# Altium PCB PCB_Keypad_Rev2_2025-01-16.pcbdoc
Units mil, origin at the board's own origin, x right, y up, seen from the top; angles counter-clockwise.
Board outline 5776.66 x 5327.31 mil, 2 copper layers (Top Layer, Bottom Layer); 33 components, 40 nets, 140 pads, 15 vias.
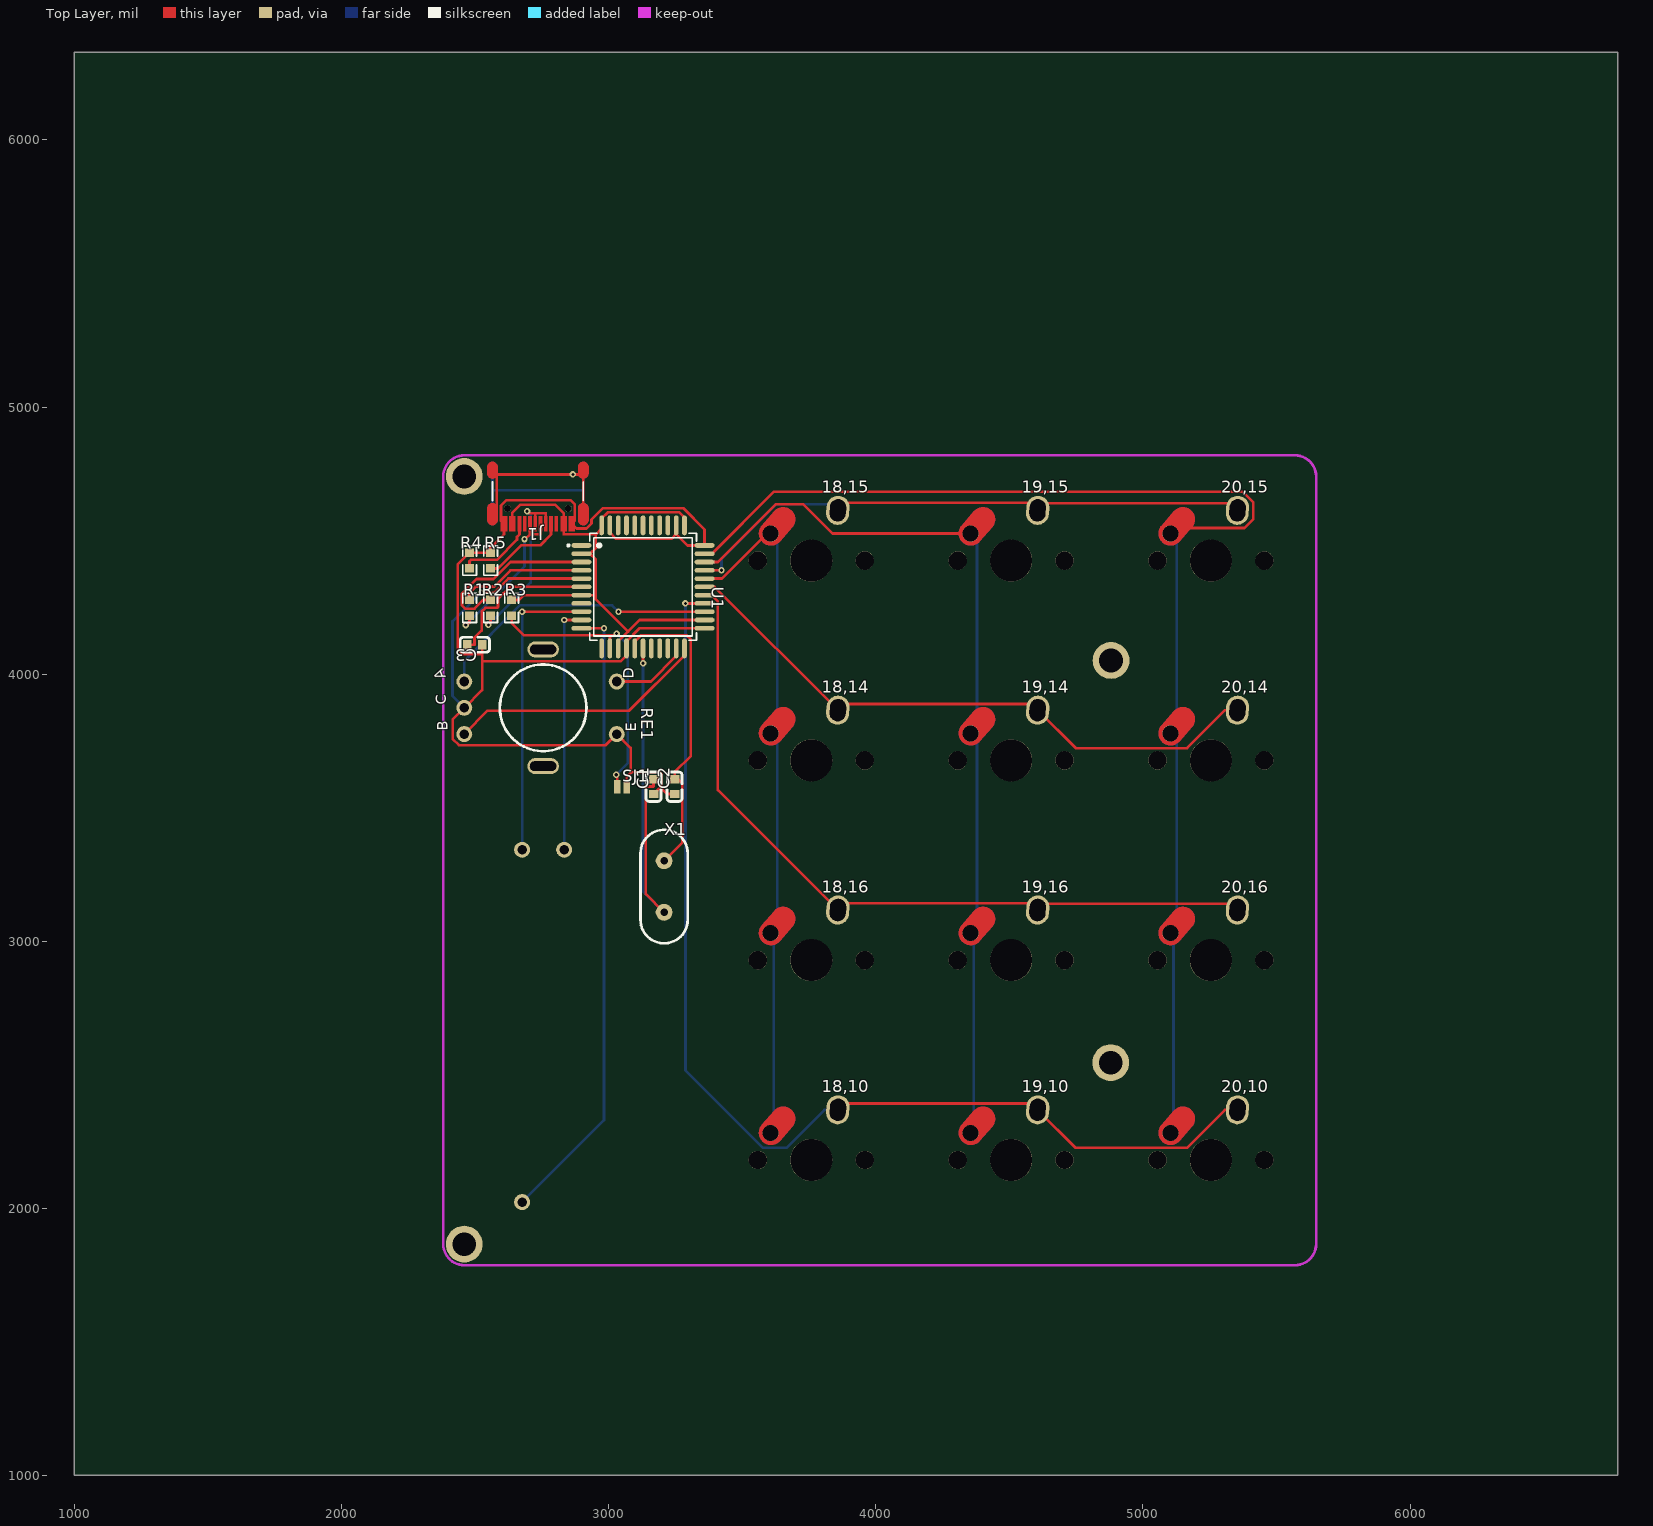
[diagram p0: Top Layer view]
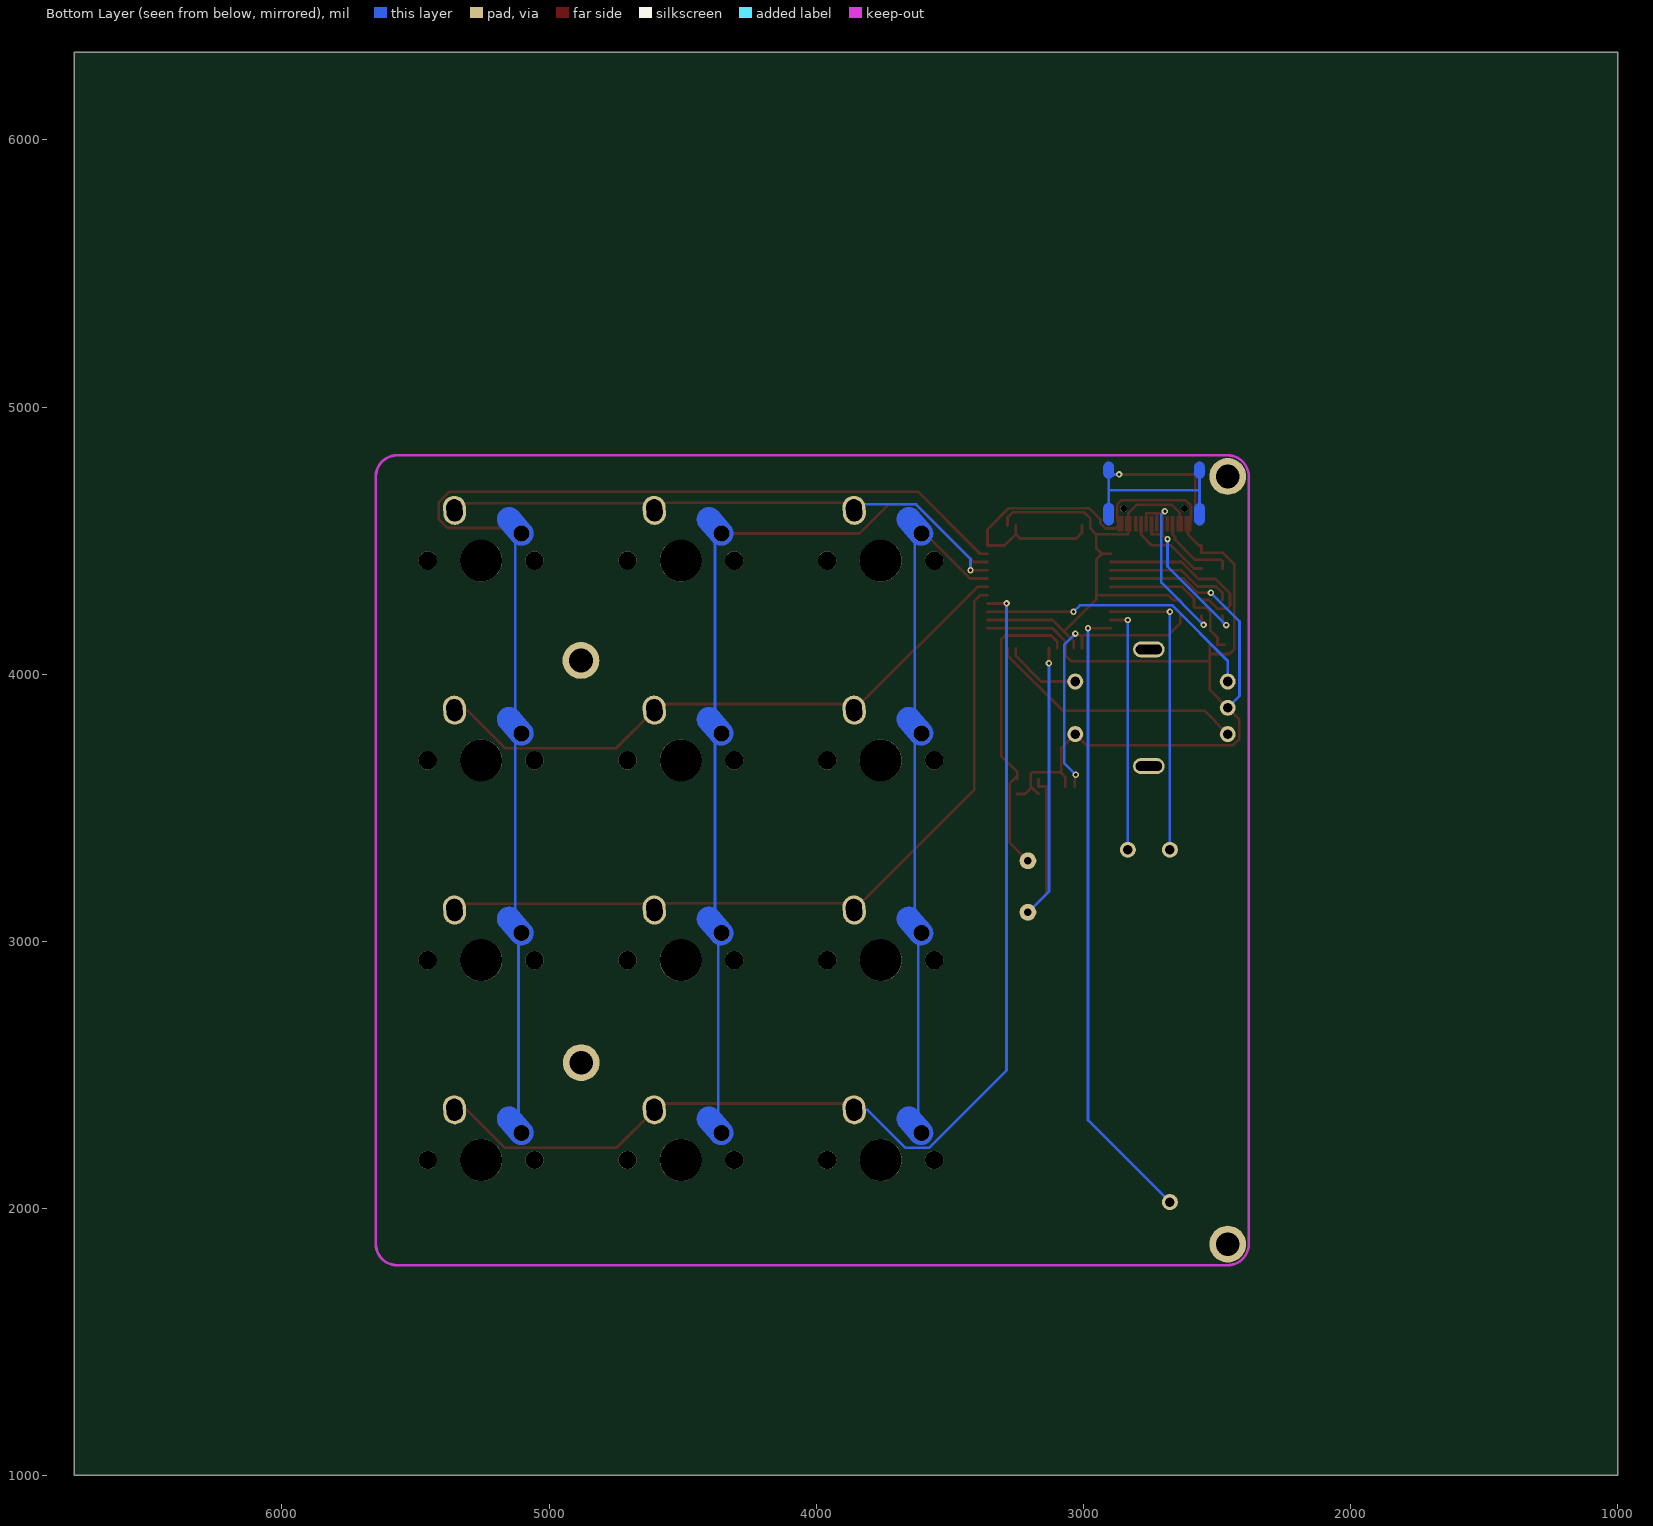
[diagram p1: Bottom Layer view, seen from below]

## Layer stack, top to bottom
Top Layer: signal copper (thickness not stored)
Dielectric: dielectric 12.6, FR-4, Dk 4.8
Bottom Layer: signal copper (thickness not stored)

## Board outline
6776.66,1000 1000,1000 1000,6327.31 6776.66,6327.31

## Components (designator, comment, footprint, x,y, rotation, side; value= is the part's Value field where it differs from the comment)
18,10 "MX_ALPS-1U-NOLED" MX_ALPS-1U-NOLED 3758.41,2181.13 r0 top
18,14 "MX_ALPS-1U-NOLED" MX_ALPS-1U-NOLED 3758.41,3677.13 r0 top
18,15 "MX_ALPS-1U-NOLED" MX_ALPS-1U-NOLED 3758.41,4425.23 r0 top
18,16 "MX_ALPS-1U-NOLED" MX_ALPS-1U-NOLED 3758.41,2929.13 r0 top
19,10 "MX_ALPS-1U-NOLED" MX_ALPS-1U-NOLED 4506.51,2181.13 r0 top
19,14 "MX_ALPS-1U-NOLED" MX_ALPS-1U-NOLED 4506.51,3677.13 r0 top
19,15 "MX_ALPS-1U-NOLED" MX_ALPS-1U-NOLED 4506.51,4425.23 r0 top
19,16 "MX_ALPS-1U-NOLED" MX_ALPS-1U-NOLED 4506.51,2929.13 r0 top
20,10 "MX_ALPS-1U-NOLED" MX_ALPS-1U-NOLED 5254.51,2181.13 r0 top
20,14 "MX_ALPS-1U-NOLED" MX_ALPS-1U-NOLED 5254.51,3677.13 r0 top
20,15 "MX_ALPS-1U-NOLED" MX_ALPS-1U-NOLED 5254.51,4425.23 r0 top
20,16 "MX_ALPS-1U-NOLED" MX_ALPS-1U-NOLED 5254.51,2929.13 r0 top
C1 "22pf" C0603 3167.9,3578.74 r90 top
C2 "22pf" C0603 3246.64,3578.74 r90 top
C3 "1uf" C0603 2498.61,4110.24 r180 top
J1 "USB_C16PIN" USB-C-16P 2734.83,4562.99 r180 top
R1 "22" R0603 2478.93,4248.03 r90 top
R2 "22" R0603 2557.67,4248.03 r90 top
R3 "10k" R0603 2636.41,4248.03 r90 top
R4 "5.1k" R0603 2478.93,4425.2 r90 top
R5 "5.1k" R0603 2557.67,4425.2 r90 top
RE1 "rotaryEncoder" ROTARYENCODER 2754.52,3874.02 r270 top
SJ1 "JUMPER-PAD-2-NO" PAD-JUMPER-2-NO_NO_SILK 3049.79,3578.74 r0 top
U1 "ATMEGA32U4-AU" QFP-44_L10.0-W10.0-P0.80-LS13.2-BL 3128.53,4326.77 r270 top
X1 "16mhz" COS-16MHZ 3207.27,3204.73 r0 top
? "" ? 4014.36,5041.54 r0 top
? "" ? 5922.07,3303.15 r0 top
? "" ? 4014.36,5326.94 r0 top
? "" ? 1980.62,2870.08 r0 top
? "" ? 2355.07,2683.07 r0 top
? "" ? 2885.77,1944.91 r0 top
? "" ? 2567.51,1762.81 r0 top
? "" ? 2035,4307.09 r0 top

## Footprints (in the part's own frame and the unit in brackets; to place one, negate y for a bottom-side part, rotate by r counter-clockwise, add the part's x,y. Pads: shape width x height; smd on the part's side, far side on the other; paste and mask are expansions set on the pad)
C0603 [mm]
  rect 0.8x0.9 smd paste+0 mask+0.051: 1(-0.7,0) 2(0.7,0)
  silkscreen extent -1.41,-0.71 1.39,0.72
COS-16MHZ [mm]
  round 1.6 hole 0.7 paste+0 mask+0.051: 1(0,2.45) 2(0,-2.45)
  silkscreen extent -2.25,-5.39 2.25,5.39
MX_ALPS-1U-NOLED [mil]
  round 60 hole 60 paste+0: 1(-152,101)
  oval 108.9x86 hole 60 slot 82.9 at 86 deg rot 86 paste+0 mask+4: 2(99.4,188)
  round 68.9 hole 68.9 unplated paste+0: ""(-200,0) ""(200,0)
  round 157 hole 157 unplated paste+0: ""(0,0)
  Top Layer region: -150.63,56.59 -152.87,56.62 -155.11,56.78 -157.34,57.04 -159.55,57.41 -161.74,57.89 -163.91,58.49 -166.04,59.18 -168.13,59.99 -170.18,60.9 -172.19,61.9 -174.14,63.01 -176.03,64.22 -177.87,65.51 -179.63,66.9 -181.32,68.37 -182.94,69.92 -184.48,71.56 -185.93,73.26 -187.3,75.04 -188.58,76.89 -189.76,78.79 -190.85,80.76 -191.84,82.77 -192.73,84.83 -193.51,86.93 -194.19,89.07 -194.76,91.24 -195.22,93.44 -195.57,95.66 -195.81,97.89 -195.94,100.13 -195.96,102.37 -195.86,104.61 -195.65,106.85 -195.34,109.07 -194.91,111.27 -194.37,113.45 -193.73,115.6 -192.97,117.71 -192.12,119.78 -191.16,121.81 -190.1,123.79 -188.95,125.72 -187.7,127.58 -186.35,129.38 -184.93,131.11 -139,183.94 -137.49,185.59 -135.89,187.17 -134.22,188.67 -132.48,190.08 -130.67,191.4 -128.79,192.64 -126.86,193.77 -124.87,194.81 -122.83,195.75 -120.75,196.58 -118.62,197.31 -116.47,197.94 -114.28,198.45 -112.08,198.86 -109.86,199.16 -107.62,199.34 -105.38,199.41 -103.13,199.38 -100.89,199.22 -98.66,198.96 -96.45,198.59 -94.26,198.11 -92.1,197.51 -89.97,196.81 -87.87,196.01 -85.82,195.1 -83.81,194.09 -81.86,192.99 -79.97,191.78 -78.14,190.49 -76.37,189.1 -74.68,187.63 -73.06,186.08 -71.52,184.44 -70.07,182.73 -68.7,180.96 -67.42,179.11 -66.24,177.21 -65.15,175.24 -64.16,173.23 -63.27,171.17 -62.49,169.07 -61.81,166.93 -61.24,164.76 -60.78,162.56 -60.43,160.34 -60.19,158.11 -60.06,155.87 -60.05,153.63 -60.14,151.39 -60.35,149.15 -60.66,146.93 -61.09,144.73 -61.63,142.55 -62.28,140.4 -63.03,138.29 -63.88,136.21 -64.84,134.19 -65.9,132.21 -67.06,130.28 -68.31,128.42 -69.65,126.62 -71.08,124.89 -117,72.06 -118.51,70.41 -120.11,68.83 -121.78,67.33 -123.52,65.92 -125.34,64.59 -127.21,63.36 -129.15,62.23 -131.14,61.19 -133.17,60.25 -135.26,59.41 -137.38,58.68 -139.53,58.06 -141.72,57.54 -143.92,57.14 -146.15,56.84 -148.38,56.66
  Bottom Layer region: -150.63,56.59 -152.87,56.62 -155.11,56.78 -157.34,57.04 -159.55,57.41 -161.74,57.89 -163.91,58.49 -166.04,59.18 -168.13,59.99 -170.18,60.9 -172.19,61.9 -174.14,63.01 -176.03,64.22 -177.87,65.51 -179.63,66.9 -181.32,68.37 -182.94,69.92 -184.48,71.56 -185.93,73.26 -187.3,75.04 -188.58,76.89 -189.76,78.79 -190.85,80.76 -191.84,82.77 -192.73,84.83 -193.51,86.93 -194.19,89.07 -194.76,91.24 -195.22,93.44 -195.57,95.66 -195.81,97.89 -195.94,100.13 -195.96,102.37 -195.86,104.61 -195.65,106.85 -195.34,109.07 -194.91,111.27 -194.37,113.45 -193.73,115.6 -192.97,117.71 -192.12,119.78 -191.16,121.81 -190.1,123.79 -188.95,125.72 -187.7,127.58 -186.35,129.38 -184.93,131.11 -139,183.94 -137.49,185.59 -135.89,187.17 -134.22,188.67 -132.48,190.08 -130.67,191.4 -128.79,192.64 -126.86,193.77 -124.87,194.81 -122.83,195.75 -120.75,196.58 -118.62,197.31 -116.47,197.94 -114.28,198.45 -112.08,198.86 -109.86,199.16 -107.62,199.34 -105.38,199.41 -103.13,199.38 -100.89,199.22 -98.66,198.96 -96.45,198.59 -94.26,198.11 -92.1,197.51 -89.97,196.81 -87.87,196.01 -85.82,195.1 -83.81,194.09 -81.86,192.99 -79.97,191.78 -78.14,190.49 -76.37,189.1 -74.68,187.63 -73.06,186.08 -71.52,184.44 -70.07,182.73 -68.7,180.96 -67.42,179.11 -66.24,177.21 -65.15,175.24 -64.16,173.23 -63.27,171.17 -62.49,169.07 -61.81,166.93 -61.24,164.76 -60.78,162.56 -60.43,160.34 -60.19,158.11 -60.06,155.87 -60.05,153.63 -60.14,151.39 -60.35,149.15 -60.66,146.93 -61.09,144.73 -61.63,142.55 -62.28,140.4 -63.03,138.29 -63.88,136.21 -64.84,134.19 -65.9,132.21 -67.06,130.28 -68.31,128.42 -69.65,126.62 -71.08,124.89 -117,72.06 -118.51,70.41 -120.11,68.83 -121.78,67.33 -123.52,65.92 -125.34,64.59 -127.21,63.36 -129.15,62.23 -131.14,61.19 -133.17,60.25 -135.26,59.41 -137.38,58.68 -139.53,58.06 -141.72,57.54 -143.92,57.14 -146.15,56.84 -148.38,56.66
  Multi-Layer region: -150.63,56.59 -152.87,56.62 -155.11,56.78 -157.34,57.04 -159.55,57.41 -161.74,57.89 -163.91,58.49 -166.04,59.18 -168.13,59.99 -170.18,60.9 -172.19,61.9 -174.14,63.01 -176.03,64.22 -177.87,65.51 -179.63,66.9 -181.32,68.37 -182.94,69.92 -184.48,71.56 -185.93,73.26 -187.3,75.04 -188.58,76.89 -189.76,78.79 -190.85,80.76 -191.84,82.77 -192.73,84.83 -193.51,86.93 -194.19,89.07 -194.76,91.24 -195.22,93.44 -195.57,95.66 -195.81,97.89 -195.94,100.13 -195.96,102.37 -195.86,104.61 -195.65,106.85 -195.34,109.07 -194.91,111.27 -194.37,113.45 -193.73,115.6 -192.97,117.71 -192.12,119.78 -191.16,121.81 -190.1,123.79 -188.95,125.72 -187.7,127.58 -186.35,129.38 -184.93,131.11 -139,183.94 -137.49,185.59 -135.89,187.17 -134.22,188.67 -132.48,190.08 -130.67,191.4 -128.79,192.64 -126.86,193.77 -124.87,194.81 -122.83,195.75 -120.75,196.58 -118.62,197.31 -116.47,197.94 -114.28,198.45 -112.08,198.86 -109.86,199.16 -107.62,199.34 -105.38,199.41 -103.13,199.38 -100.89,199.22 -98.66,198.96 -96.45,198.59 -94.26,198.11 -92.1,197.51 -89.97,196.81 -87.87,196.01 -85.82,195.1 -83.81,194.09 -81.86,192.99 -79.97,191.78 -78.14,190.49 -76.37,189.1 -74.68,187.63 -73.06,186.08 -71.52,184.44 -70.07,182.73 -68.7,180.96 -67.42,179.11 -66.24,177.21 -65.15,175.24 -64.16,173.23 -63.27,171.17 -62.49,169.07 -61.81,166.93 -61.24,164.76 -60.78,162.56 -60.43,160.34 -60.19,158.11 -60.06,155.87 -60.05,153.63 -60.14,151.39 -60.35,149.15 -60.66,146.93 -61.09,144.73 -61.63,142.55 -62.28,140.4 -63.03,138.29 -63.88,136.21 -64.84,134.19 -65.9,132.21 -67.06,130.28 -68.31,128.42 -69.65,126.62 -71.08,124.89 -117,72.06 -118.51,70.41 -120.11,68.83 -121.78,67.33 -123.52,65.92 -125.34,64.59 -127.21,63.36 -129.15,62.23 -131.14,61.19 -133.17,60.25 -135.26,59.41 -137.38,58.68 -139.53,58.06 -141.72,57.54 -143.92,57.14 -146.15,56.84 -148.38,56.66
PAD-JUMPER-2-NO_NO_SILK [mil]
  rect 25x50 smd paste+0 mask+2: 1(-18,0) 2(18,0)
QFP-44_L10.0-W10.0-P0.80-LS13.2-BL [mil]
  oval 17.36x74.62 smd paste+0 mask+2: 1(-155,-230.37) 2(-124,-230.37) 3(-93,-230.37) 4(-62,-230.37) 5(-31,-230.37) 6(0,-230.37) 7(31,-230.37) 8(62,-230.37) 9(93,-230.37) 10(124,-230.37) 11(155,-230.37) 23(155,230.37) 24(124,230.37) 25(93,230.37) 26(62,230.37) 27(31,230.37) 28(0,230.37) 29(-31,230.37) 30(-62,230.37) 31(-93,230.37) 32(-124,230.37) 33(-155,230.37)
  oval 74.62x17.36 smd paste+0 mask+2: 12(230.37,-155) 13(230.37,-124) 14(230.37,-93) 15(230.37,-62) 16(230.37,-31) 17(230.37,0) 18(230.37,31) 19(230.37,62) 20(230.37,93) 21(230.37,124) 22(230.37,155) 34(-230.37,155) 35(-230.37,124) 36(-230.37,93) 37(-230.37,62) 38(-230.37,31) 39(-230.37,0) 40(-230.37,-31) 41(-230.37,-62) 42(-230.37,-93) 43(-230.37,-124) 44(-230.37,-155)
  silkscreen extent -200,-283 200,200
R0603 [mil]
  rect 31.75x34.02 smd paste-3937.01 mask+2: 1(-29.65,0) 2(29.65,0)
  silkscreen extent -55,-26 55,26
ROTARYENCODER [mil]
  round 60 hole 36 paste+0 mask+2: 1(-98.42,-295.28) 2(0,-295.28) 3(98.43,-295.28) 4(-98.42,275.59) 5(98.43,275.59)
  oval 60x118.11 hole 36 slot 98.43 at 90 deg paste+0: ""(-218.5,0) ""(218.5,0)
  silkscreen extent -162,-162 162,162
USB-C-16P [mm]
  round 0.65 hole 0.65 unplated paste+0: ""(-2.89,-1.445) ""(2.89,-1.445)
  Top Layer region: 4.82,-5.395 4.816,-5.455 4.805,-5.515 4.787,-5.572 4.763,-5.627 4.732,-5.679 4.694,-5.726 4.652,-5.769 4.604,-5.806 4.552,-5.838 4.497,-5.863 4.44,-5.88 4.38,-5.891 4.32,-5.895 4.32,-5.895 4.26,-5.891 4.2,-5.88 4.143,-5.863 4.088,-5.838 4.036,-5.806 3.988,-5.769 3.946,-5.726 3.909,-5.679 3.877,-5.627 3.852,-5.572 3.835,-5.515 3.824,-5.455 3.82,-5.395 3.82,-4.795 3.824,-4.735 3.835,-4.675 3.852,-4.618 3.877,-4.563 3.909,-4.511 3.946,-4.464 3.988,-4.421 4.036,-4.384 4.088,-4.352 4.143,-4.327 4.2,-4.31 4.26,-4.299 4.32,-4.295 4.32,-4.295 4.38,-4.299 4.44,-4.31 4.497,-4.327 4.552,-4.352 4.604,-4.384 4.652,-4.421 4.694,-4.464 4.732,-4.511 4.763,-4.563 4.787,-4.618 4.805,-4.675 4.816,-4.735 4.82,-4.795
  Top Layer region: 0.6,0.725 0.9,0.725 0.9,-0.725 0.6,-0.725
  Top Layer region: 0.1,0.725 0.4,0.725 0.4,-0.725 0.1,-0.725
  Top Layer region: 2.925,0.725 3.525,0.725 3.525,-0.725 2.925,-0.725
  Top Layer region: 2.175,0.725 2.725,0.725 2.725,-0.725 2.175,-0.725
  Top Layer region: 1.6,0.725 1.9,0.725 1.9,-0.725 1.6,-0.725
  Top Layer region: 1.1,0.725 1.4,0.725 1.4,-0.725 1.1,-0.725
  Top Layer region: -0.6,-0.725 -0.9,-0.725 -0.9,0.725 -0.6,0.725
  Top Layer region: -0.1,-0.725 -0.4,-0.725 -0.4,0.725 -0.1,0.725
  Top Layer region: -2.925,-0.725 -3.525,-0.725 -3.525,0.725 -2.925,0.725
  Top Layer region: -2.175,-0.725 -2.725,-0.725 -2.725,0.725 -2.175,0.725
  Top Layer region: -1.6,-0.725 -1.9,-0.725 -1.9,0.725 -1.6,0.725
  Top Layer region: -1.1,-0.725 -1.4,-0.725 -1.4,0.725 -1.1,0.725
  Top Layer region: -3.82,-1.465 -3.824,-1.525 -3.835,-1.585 -3.852,-1.642 -3.877,-1.697 -3.909,-1.749 -3.946,-1.797 -3.988,-1.839 -4.036,-1.877 -4.088,-1.908 -4.143,-1.932 -4.2,-1.95 -4.26,-1.961 -4.32,-1.965 -4.32,-1.965 -4.38,-1.961 -4.44,-1.95 -4.497,-1.932 -4.552,-1.908 -4.604,-1.877 -4.652,-1.839 -4.694,-1.797 -4.732,-1.749 -4.763,-1.697 -4.787,-1.642 -4.805,-1.585 -4.816,-1.525 -4.82,-1.465 -4.82,-0.365 -4.816,-0.305 -4.805,-0.245 -4.787,-0.188 -4.763,-0.133 -4.732,-0.081 -4.694,-0.034 -4.652,0.009 -4.604,0.046 -4.552,0.078 -4.497,0.103 -4.44,0.12 -4.38,0.131 -4.32,0.135 -4.32,0.135 -4.26,0.131 -4.2,0.12 -4.143,0.103 -4.088,0.078 -4.036,0.046 -3.988,0.009 -3.946,-0.034 -3.909,-0.081 -3.877,-0.133 -3.852,-0.188 -3.835,-0.245 -3.824,-0.305 -3.82,-0.365
  Top Layer region: 4.82,-1.465 4.816,-1.525 4.805,-1.585 4.787,-1.642 4.763,-1.697 4.732,-1.749 4.694,-1.797 4.652,-1.839 4.604,-1.877 4.552,-1.908 4.497,-1.932 4.44,-1.95 4.38,-1.961 4.32,-1.965 4.32,-1.965 4.26,-1.961 4.2,-1.95 4.143,-1.932 4.088,-1.908 4.036,-1.877 3.988,-1.839 3.946,-1.797 3.909,-1.749 3.877,-1.697 3.852,-1.642 3.835,-1.585 3.824,-1.525 3.82,-1.465 3.82,-0.365 3.824,-0.305 3.835,-0.245 3.852,-0.188 3.877,-0.133 3.909,-0.081 3.946,-0.034 3.988,0.009 4.036,0.046 4.088,0.078 4.143,0.103 4.2,0.12 4.26,0.131 4.32,0.135 4.32,0.135 4.38,0.131 4.44,0.12 4.497,0.103 4.552,0.078 4.604,0.046 4.652,0.009 4.694,-0.034 4.732,-0.081 4.763,-0.133 4.787,-0.188 4.805,-0.245 4.816,-0.305 4.82,-0.365
  Top Layer region: -3.82,-5.395 -3.824,-5.455 -3.835,-5.515 -3.852,-5.572 -3.877,-5.627 -3.909,-5.679 -3.946,-5.726 -3.988,-5.769 -4.036,-5.806 -4.088,-5.838 -4.143,-5.863 -4.2,-5.88 -4.26,-5.891 -4.32,-5.895 -4.32,-5.895 -4.38,-5.891 -4.44,-5.88 -4.497,-5.863 -4.552,-5.838 -4.604,-5.806 -4.652,-5.769 -4.694,-5.726 -4.732,-5.679 -4.763,-5.627 -4.787,-5.572 -4.805,-5.515 -4.816,-5.455 -4.82,-5.395 -4.82,-4.795 -4.816,-4.735 -4.805,-4.675 -4.787,-4.618 -4.763,-4.563 -4.732,-4.511 -4.694,-4.464 -4.652,-4.421 -4.604,-4.384 -4.552,-4.352 -4.497,-4.327 -4.44,-4.31 -4.38,-4.299 -4.32,-4.295 -4.32,-4.295 -4.26,-4.299 -4.2,-4.31 -4.143,-4.327 -4.088,-4.352 -4.036,-4.384 -3.988,-4.421 -3.946,-4.464 -3.909,-4.511 -3.877,-4.563 -3.852,-4.618 -3.835,-4.675 -3.824,-4.735 -3.82,-4.795
  Bottom Layer region: -4.82,-0.365 -4.816,-0.305 -4.805,-0.245 -4.787,-0.188 -4.763,-0.133 -4.732,-0.081 -4.694,-0.034 -4.652,0.009 -4.604,0.046 -4.552,0.078 -4.497,0.103 -4.44,0.12 -4.38,0.131 -4.32,0.135 -4.32,0.135 -4.26,0.131 -4.2,0.12 -4.143,0.103 -4.088,0.078 -4.036,0.046 -3.988,0.009 -3.946,-0.034 -3.909,-0.081 -3.877,-0.133 -3.852,-0.188 -3.835,-0.245 -3.824,-0.305 -3.82,-0.365 -3.82,-1.465 -3.824,-1.525 -3.835,-1.585 -3.852,-1.642 -3.877,-1.697 -3.909,-1.749 -3.946,-1.797 -3.988,-1.839 -4.036,-1.877 -4.088,-1.908 -4.143,-1.932 -4.2,-1.95 -4.26,-1.961 -4.32,-1.965 -4.32,-1.965 -4.38,-1.961 -4.44,-1.95 -4.497,-1.932 -4.552,-1.908 -4.604,-1.877 -4.652,-1.839 -4.694,-1.797 -4.732,-1.749 -4.763,-1.697 -4.787,-1.642 -4.805,-1.585 -4.816,-1.525 -4.82,-1.465
  Bottom Layer region: 3.82,-0.365 3.824,-0.305 3.835,-0.245 3.852,-0.188 3.877,-0.133 3.909,-0.081 3.946,-0.034 3.988,0.009 4.036,0.046 4.088,0.078 4.143,0.103 4.2,0.12 4.26,0.131 4.32,0.135 4.32,0.135 4.38,0.131 4.44,0.12 4.497,0.103 4.552,0.078 4.604,0.046 4.652,0.009 4.694,-0.034 4.732,-0.081 4.763,-0.133 4.787,-0.188 4.805,-0.245 4.816,-0.305 4.82,-0.365 4.82,-1.465 4.816,-1.525 4.805,-1.585 4.787,-1.642 4.763,-1.697 4.732,-1.749 4.694,-1.797 4.652,-1.839 4.604,-1.877 4.552,-1.908 4.497,-1.932 4.44,-1.95 4.38,-1.961 4.32,-1.965 4.32,-1.965 4.26,-1.961 4.2,-1.95 4.143,-1.932 4.088,-1.908 4.036,-1.877 3.988,-1.839 3.946,-1.797 3.909,-1.749 3.877,-1.697 3.852,-1.642 3.835,-1.585 3.824,-1.525 3.82,-1.465
  Bottom Layer region: -4.82,-4.795 -4.816,-4.735 -4.805,-4.675 -4.787,-4.618 -4.763,-4.563 -4.732,-4.511 -4.694,-4.464 -4.652,-4.421 -4.604,-4.384 -4.552,-4.352 -4.497,-4.327 -4.44,-4.31 -4.38,-4.299 -4.32,-4.295 -4.32,-4.295 -4.26,-4.299 -4.2,-4.31 -4.143,-4.327 -4.088,-4.352 -4.036,-4.384 -3.988,-4.421 -3.946,-4.464 -3.909,-4.511 -3.877,-4.563 -3.852,-4.618 -3.835,-4.675 -3.824,-4.735 -3.82,-4.795 -3.82,-5.395 -3.824,-5.455 -3.835,-5.515 -3.852,-5.572 -3.877,-5.627 -3.909,-5.679 -3.946,-5.726 -3.988,-5.769 -4.036,-5.806 -4.088,-5.838 -4.143,-5.863 -4.2,-5.88 -4.26,-5.891 -4.32,-5.895 -4.32,-5.895 -4.38,-5.891 -4.44,-5.88 -4.497,-5.863 -4.552,-5.838 -4.604,-5.806 -4.652,-5.769 -4.694,-5.726 -4.732,-5.679 -4.763,-5.627 -4.787,-5.572 -4.805,-5.515 -4.816,-5.455 -4.82,-5.395
  Bottom Layer region: 3.82,-4.795 3.824,-4.735 3.835,-4.675 3.852,-4.618 3.877,-4.563 3.909,-4.511 3.946,-4.464 3.988,-4.421 4.036,-4.384 4.088,-4.352 4.143,-4.327 4.2,-4.31 4.26,-4.299 4.32,-4.295 4.32,-4.295 4.38,-4.299 4.44,-4.31 4.497,-4.327 4.552,-4.352 4.604,-4.384 4.652,-4.421 4.694,-4.464 4.732,-4.511 4.763,-4.563 4.787,-4.618 4.805,-4.675 4.816,-4.735 4.82,-4.795 4.82,-5.395 4.816,-5.455 4.805,-5.515 4.787,-5.572 4.763,-5.627 4.732,-5.679 4.694,-5.726 4.652,-5.769 4.604,-5.806 4.552,-5.838 4.497,-5.863 4.44,-5.88 4.38,-5.891 4.32,-5.895 4.32,-5.895 4.26,-5.891 4.2,-5.88 4.143,-5.863 4.088,-5.838 4.036,-5.806 3.988,-5.769 3.946,-5.726 3.909,-5.679 3.877,-5.627 3.852,-5.572 3.835,-5.515 3.824,-5.455 3.82,-5.395
  silkscreen extent -4.32,-4 4.32,-2.2
? [mil]

## Free pads (board coordinates)
  round 137.79 hole 88.58 paste+0 mask+2: 1(2459.24,1866.15) 1(2459.24,4740.16) 1(4879.51,2545.51) 1(4880.5,4051.18)
  round 60 hole 36 paste+0 mask+2: 2(2675.78,3342.52) 3(2833.26,3342.52) 4(2675.78,2023.63)

## Via types
v1: diameter 24.02, hole 12.01, Top Layer to Bottom Layer, tented both sides, 15 vias

## Nets (pads, with @x,y where several pads share a name; then routed paths per layer and width w, separated by ;. In a path a pad name is that pad's centre, name@x,y a point inside that pad or via, vN(x,y) a via of type N, cw(c..) or ccw(c..) an arc to the next point about the centre after c; other vN are vias at no path point)
COL1: 18,10.1 18,14.1 18,15.1 18,16.1 U1.29 | length 2660
  Top Layer w10: U1.29 3423.75,4357.77 3592.21,4526.23 3606.41,4526.23
  Bottom Layer w10: 3606.41,2282.13 3630.41,2306.13 3630.41,2309.13 3618.41,2321.13 3618.41,3030.13 ; 3606.41,3030.13 3618.41,3030.13 ; 3630.41,4553.23 3630.41,4550.23 3606.41,4526.23 3630.41,4502.23 3630.41,3805.13 3630.41,3802.13 3606.41,3778.13 3630.41,3754.13 3630.41,3057.13 3630.41,3042.13 3618.41,3030.13
COL2: 19,10.1 19,14.1 19,15.1 19,16.1 U1.31 | length 3473.2
  Top Layer w10: U1.31 3409.05,4419.77 3625.04,4635.76 3728.54,4635.76 3838.07,4526.23 4354.51,4526.23
  Bottom Layer w10: 4354.51,2282.13 4378.51,2306.13 4378.51,2309.13 4366.51,2321.13 4366.51,3030.13 ; 4354.51,3030.13 4366.51,3030.13 ; 4378.51,4553.23 4378.51,4550.23 4354.51,4526.23 4378.51,4502.23 4378.51,3805.13 4378.51,3802.13 4354.51,3778.13 4378.51,3754.13 4378.51,3057.13 4378.51,3042.13 4366.51,3030.13
COL3: 20,10.1 20,14.1 20,15.1 20,16.1 U1.32 | length 4875.3
  Top Layer w10: U1.32 3386.1,4450.77 3618.29,4682.96 5373.06,4682.96 5413.47,4642.55 5413.47,4580.73 5380.09,4547.35 5132.39,4547.35 5126.51,4553.23
  Bottom Layer w10: 5102.51,2282.13 5126.51,2306.13 5126.51,2309.13 5114.51,2321.13 5114.51,3030.13 ; 5102.51,3030.13 5114.51,3030.13 ; 5126.51,4553.23 5126.51,4550.23 5102.51,4526.23 5126.51,4502.23 5126.51,3805.13 5126.51,3802.13 5102.51,3778.13 5126.51,3754.13 5126.51,3057.13 5126.51,3042.13 5114.51,3030.13
COL4: RE1.4 U1.21 | length 290.8
  Top Layer w10: RE1.4 3157.71,3972.44 3252.53,4067.26 U1.21
D+: R1.2 U1.4 | length 481
  Top Layer w10: R1.2 2478.93,4304.56 2502.72,4328.35 2571.97,4328.35 2632.39,4388.77 U1.4
D-: R2.2 U1.3 | length 665.8
  Top Layer w10: R2.2 2529.67,4277.69 2497.3,4245.32 2462.77,4245.32 2450.87,4257.22 2450.87,4301.65 2505.25,4356.03 2568.86,4356.03 2632.6,4419.77 U1.3
GND: C1.1 C2.1 C3.1 R4.2 R5.2 RE1.2 RE1.5 SJ1.2 U1.5 U1.15 U1.23 U1.33 U1.35 U1.43 | length 5555.5
  Top Layer w10: v1(2522.07,4304.63) 2570.96,4304.63 2624.1,4357.77 U1.5 ; C3.1 2526.17,4075.35 ; U1.43 3004.53,4529.51 3026.02,4508.02 3236.2,4508.02 U1.35@3252.53,4524.35 ; SJ1.2 3067.79,3614.74 3082.16,3629.11 3082.16,3633.11 ; C1.1 3192.92,3576.21 ; C2.1 3217.93,3551.19 3192.92,3576.21 ; U1.35 U1.35@3252.53,4524.35 ; U1.23 3115.96,4171.77 3066.53,4122.34 U1.15 3066.53,4070.06 3044.43,4047.96 2526.17,4047.96 ; 2526.17,4047.96 2526.17,3940.95 RE1.2 2416.01,3830.79 2416.01,3756.98 2438.66,3734.33 2988.85,3734.33 RE1.5 3082.16,3723.54 3082.16,3633.11 ; 2526.17,4047.96 2526.17,4075.35 ; 2526.17,4075.35 2453.43,4075.35 2434.56,4094.22 2434.56,4410.49 R4.2 R5.2 2557.66,4481.72 2566.11,4481.72 2607.86,4523.47 2607.86,4562.99 2597,4573.85 2597,4631.47 2615.93,4650.4 2858,4650.4 2873.31,4635.09 2873.31,4574.5 2861.8,4562.99 2879.45,4545.34 2916.38,4545.34 2935.65,4564.61 2935.65,4578.86 2978.36,4621.57 3279.1,4621.57 3358.9,4541.77 U1.33 3295.1,4481.78 U1.35@3252.53,4524.35 ; 3082.16,3633.11 3190.19,3633.11 3196.68,3626.62 3196.68,3579.97 3192.92,3576.21
  Bottom Layer w10: RE1.2 2414.86,3918.4 2414.86,4197.42 v1(2522.07,4304.63)
J1_A5: R5.1 | length 319.4
  Top Layer w10: R5.1 2585.66,4395.54 2672.46,4482.34 2743.72,4482.34 2784.04,4522.66 2784.04,4562.99
J1_B5: R4.1 | length 301.4
  Top Layer w10: R4.1 2478.93,4422.41 2484.44,4427.92 2580.9,4427.92 2656.4,4503.42 2656.4,4513.94 2665.93,4523.47 2665.93,4562.99
J1_SHLD1:  | length 1372
  Top Layer w10: 2564.75,4599.01 2580.74,4615 2580.74,4747.59 ; 2564.75,4763.58 2580.74,4747.59 ; 2904.91,4599.01 2904.91,4731.6 2888.92,4747.59 ; 2904.91,4763.58 2888.92,4747.59 ; 2580.74,4747.59 v1(2865.98,4747.59) 2888.92,4747.59
  Bottom Layer w10: 2564.75,4599.01 2564.75,4689.01 ; 2564.75,4763.58 2564.75,4689.01 ; v1(2865.98,4747.59) 2904.91,4747.59 ; 2904.91,4599.01 2904.91,4689.01 ; 2904.91,4763.58 2904.91,4747.59 ; 2564.75,4689.01 2904.91,4689.01 ; 2904.91,4689.01 2904.91,4747.59
R1_1: R1.1 | length 603.8
  Top Layer w10: v1(2464.88,4183.57) 2472.82,4191.51 2478.93,4191.51 R1.1 ; v1(2684.62,4505.6) 2687.43,4505.6 2705.3,4523.47 ; 2705.3,4562.99 2705.3,4523.47 ; 2744.67,4562.99 2744.67,4523.47 2744.6,4523.4 2705.37,4523.4 2705.3,4523.47
  Bottom Layer w10: v1(2464.88,4183.57) 2684.62,4403.31 v1(2684.62,4505.6)
R2_1: R2.1 | length 686.9
  Top Layer w10: v1(2549.63,4184.38) 2556.76,4191.51 2557.66,4191.51 R2.1 ; v1(2694.38,4610.2) 2701.99,4602.59 2724.99,4602.59 ; 2724.99,4562.99 2724.99,4602.53 2724.99,4602.59 ; 2764.36,4562.99 2764.36,4578.79 2764.36,4602.53 2764.3,4602.59 2724.99,4602.59
  Bottom Layer w10: v1(2549.63,4184.38) 2707.68,4342.43 2707.68,4596.9 v1(2694.38,4610.2)
RESET: R3.1 SJ1.1 U1.13 | length 1100.8
  Top Layer w10: R3.1 2636.41,4191.51 2682.42,4145.5 3004.53,4145.5 ; U1.13 3004.53,4145.5 ; v1(3027.87,3623) 3031.79,3619.08 SJ1.1 ; v1(3029.64,4151.89) 3023.25,4145.5 3004.53,4145.5
  Bottom Layer w10: v1(3027.87,3623) 3071.17,3666.3 3071.17,4110.36 v1(3029.64,4151.89)
ROT1: RE1.3 U1.22 | length 972.7
  Top Layer w10: RE1.3 2546.84,3863.19 3076.86,3863.19 3283.53,4069.86 U1.22
ROT2: RE1.1 U1.25 | length 1073.3
  Top Layer w10: v1(3036.53,4233.77) U1.25
  Bottom Layer w10: RE1.1 2459.24,4050.19 2666.81,4257.76 3012.54,4257.76 v1(3036.53,4233.77)
ROW1: 18,15.2 19,15.2 20,15.2 U1.30 | length 2176.9
  Top Layer w10: U1.30 v1(3422.14,4388.77) ; 3857.81,4613.23 3886.23,4641.65 4577.49,4641.65 4605.91,4613.23 4632.07,4639.39 5327.75,4639.39 5353.91,4613.23
  Bottom Layer w10: v1(3422.14,4388.77) 3422.14,4431.64 3626.2,4635.7 3835.34,4635.7 3857.81,4613.23
ROW2: 18,14.2 19,14.2 20,14.2 U1.28 | length 2323.5
  Top Layer w10: U1.28 3396.17,4326.77 3857.81,3865.13 3881.05,3888.37 4582.67,3888.37 4605.91,3865.13 4748.4,3722.64 5164.93,3722.64 5307.42,3865.13 5353.91,3865.13
ROW3: 18,16.2 19,16.2 20,16.2 U1.27 | length 2936.2
  Top Layer w10: U1.27 3384.53,4295.77 3408.39,4271.91 3408.39,3566.55 3857.81,3117.13 3882.48,3141.8 4581.24,3141.8 4605.91,3117.13 4629.25,3140.47 5330.57,3140.47 5353.91,3117.13
ROW4: 18,10.2 19,10.2 20,10.2 U1.26 | length 4203.2
  Top Layer w10: v1(3287.25,4264.77) U1.26 ; 3857.81,2369.13 3881.17,2392.49 4582.55,2392.49 4605.91,2369.13 4748.4,2226.64 5164.93,2226.64 5307.42,2369.13 5353.91,2369.13
  Bottom Layer w10: v1(3287.25,4264.77) 3287.25,2516.65 3577.49,2226.41 3665.14,2226.41 3807.86,2369.13 3857.81,2369.13
S$8512: 
SL1: U1.20
SL2: U1.19
SL3: U1.18
SLIDE1: pad.4 U1.11 | length 2359.3
  Top Layer w10: U1.11 v1(2982.36,4171.77)
  Bottom Layer w10: pad.4 2982.36,2330.21 v1(2982.36,4171.77)
SLIDE2: pad.3 U1.10 | length 925.2
  Top Layer w10: v1(2833.26,4202.77) U1.10
  Bottom Layer w10: pad.3 v1(2833.26,4202.77)
SLIDE3: pad.2 U1.9 | length 1113.6
  Top Layer w10: v1(2675.78,4233.77) U1.9
  Bottom Layer w10: pad.2 v1(2675.78,4233.77)
U1_1: U1.1
U1_6: C3.2 U1.6 | length 591.7
  Top Layer w10: C3.2 2497.79,4110.24 2497.79,4136.94 2524.39,4163.54 2524.39,4233.62 2539,4248.23 2582.82,4248.23 2585.73,4251.14 2585.73,4282.26 2630.24,4326.77 U1.6
U1_8: U1.8
U1_12: U1.12
U1_16: C2.2 U1.16 X1.1 | length 1158.3
  Top Layer w10: U1.16 3097.53,4122.07 3120.37,4144.91 3291.62,4144.91 3307.56,4128.97 3307.56,3693.96 3246.64,3633.04 C2.2@3246.64,3619.67 ; X1.1 3275.42,3369.34 3275.42,3590.89 C2.2@3246.64,3619.67 ; C2.2 C2.2@3246.64,3619.67
U1_17: C1.2 U1.17 X1.2 | length 1574.6
  Top Layer w10: v1(3128.53,4041.06) U1.17 ; C1.2 3167.9,3579.57 3141.17,3579.57 3139.12,3577.52 3139.12,3176.42 X1.2
  Bottom Layer w10: v1(3128.53,4041.06) 3128.53,3187.01 X1.2
U1_36: U1.36
U1_37: U1.37
U1_38: U1.38
U1_39: U1.39
U1_40: U1.40
U1_41: U1.41
U1_42: U1.42
VCC: R3.2 U1.2 U1.7 U1.14 U1.24 U1.34 U1.44 | length 2051.9
  Top Layer w10: R3.2 2664.4,4277.69 2682.48,4295.77 U1.7 2950.76,4295.77 ; 2638.37,4562.99 2638.37,4602.53 2670.19,4634.35 2799.47,4634.35 2831.29,4602.53 2831.29,4562.99 2831.29,4543.23 2831.29,4523.47 2831.36,4523.4 2951.88,4523.4 ; U1.2 U1.2@2930.23,4450.77 ; U1.14 3035.53,4122.7 3072.02,4159.19 ; U1.34 3283.53,4586.24 3264.26,4605.51 2996.37,4605.51 2973.53,4582.67 U1.44 2973.53,4545.05 2951.88,4523.4 ; U1.24 3115.6,4202.77 3072.02,4159.19 ; U1.2@2930.23,4450.77 2950.76,4430.24 2950.76,4295.77 ; U1.2@2930.23,4450.77 2951.88,4472.42 2951.88,4523.4 ; 2950.76,4295.77 2950.76,4280.45 3072.02,4159.19
pads on no net: 18,10. 18,14. 18,15. 18,16. 19,10. 19,14. 19,15. 19,16. 20,10. 20,14. 20,15. 20,16. J1. RE1.

## Keep-outs
Keep-Out Layer:
  lines w10 net S$8512: 2380.5,1866.15 ccw(c2459.24,1866.15) 2459.24,1787.41 ; 2380.5,4740.16 cw(c2459.24,4740.16) 2459.24,4818.9 ; 5569.47,1787.41 ccw(c5569.47,1866.15) 5648.21,1866.15 ; 5569.47,4818.9 cw(c5569.47,4740.16) 5648.21,4740.16

## Text inside footprints (layer, text, board x,y; h text height)
18,10: Document "1U" at 3727.41,2425.13 h50
18,14: Document "1U" at 3727.41,3921.13 h50
18,15: Document "1U" at 3727.41,4669.23 h50
18,16: Document "1U" at 3727.41,3173.13 h50
19,10: Document "1U" at 4475.51,2425.13 h50
19,14: Document "1U" at 4475.51,3921.13 h50
19,15: Document "1U" at 4475.51,4669.23 h50
19,16: Document "1U" at 4475.51,3173.13 h50
20,10: Document "1U" at 5223.51,2425.13 h50
20,14: Document "1U" at 5223.51,3921.13 h50
20,15: Document "1U" at 5223.51,4669.23 h50
20,16: Document "1U" at 5223.51,3173.13 h50
RE1: Top Overlay "A" at 2392.31,3987.64 h39.37 r111; Top Overlay "C" at 2391.85,3885.32 h39.37 r90; Top Overlay "B" at 2397.44,3788.74 h39.37 r90; Top Overlay "D" at 3093.02,3982.17 h39.37 r90; Top Overlay "E" at 3102.43,3783.74 h39.37 r90